# EAGLE board LIC_rack_PB-00 (EAGLE 7.2.0)
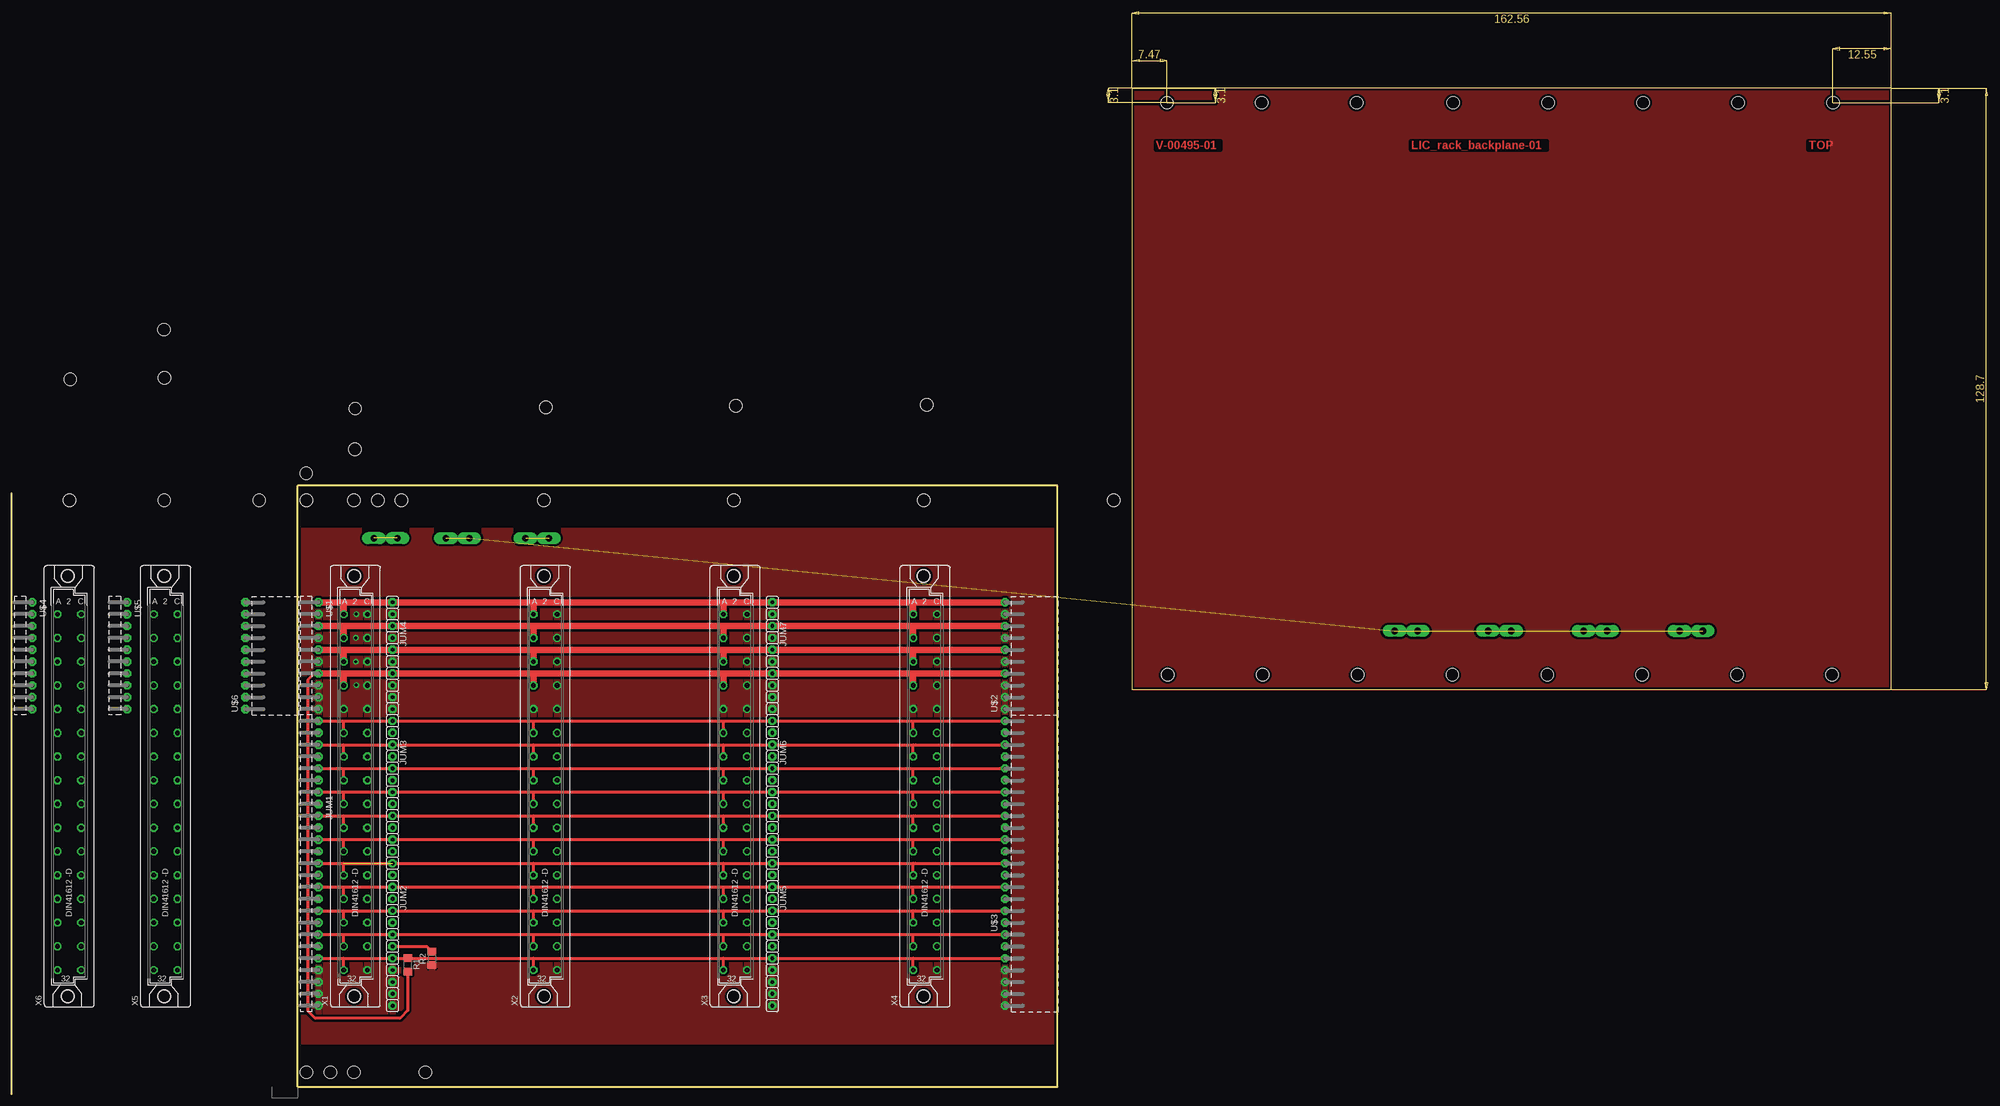
[diagram p0: board, top side]
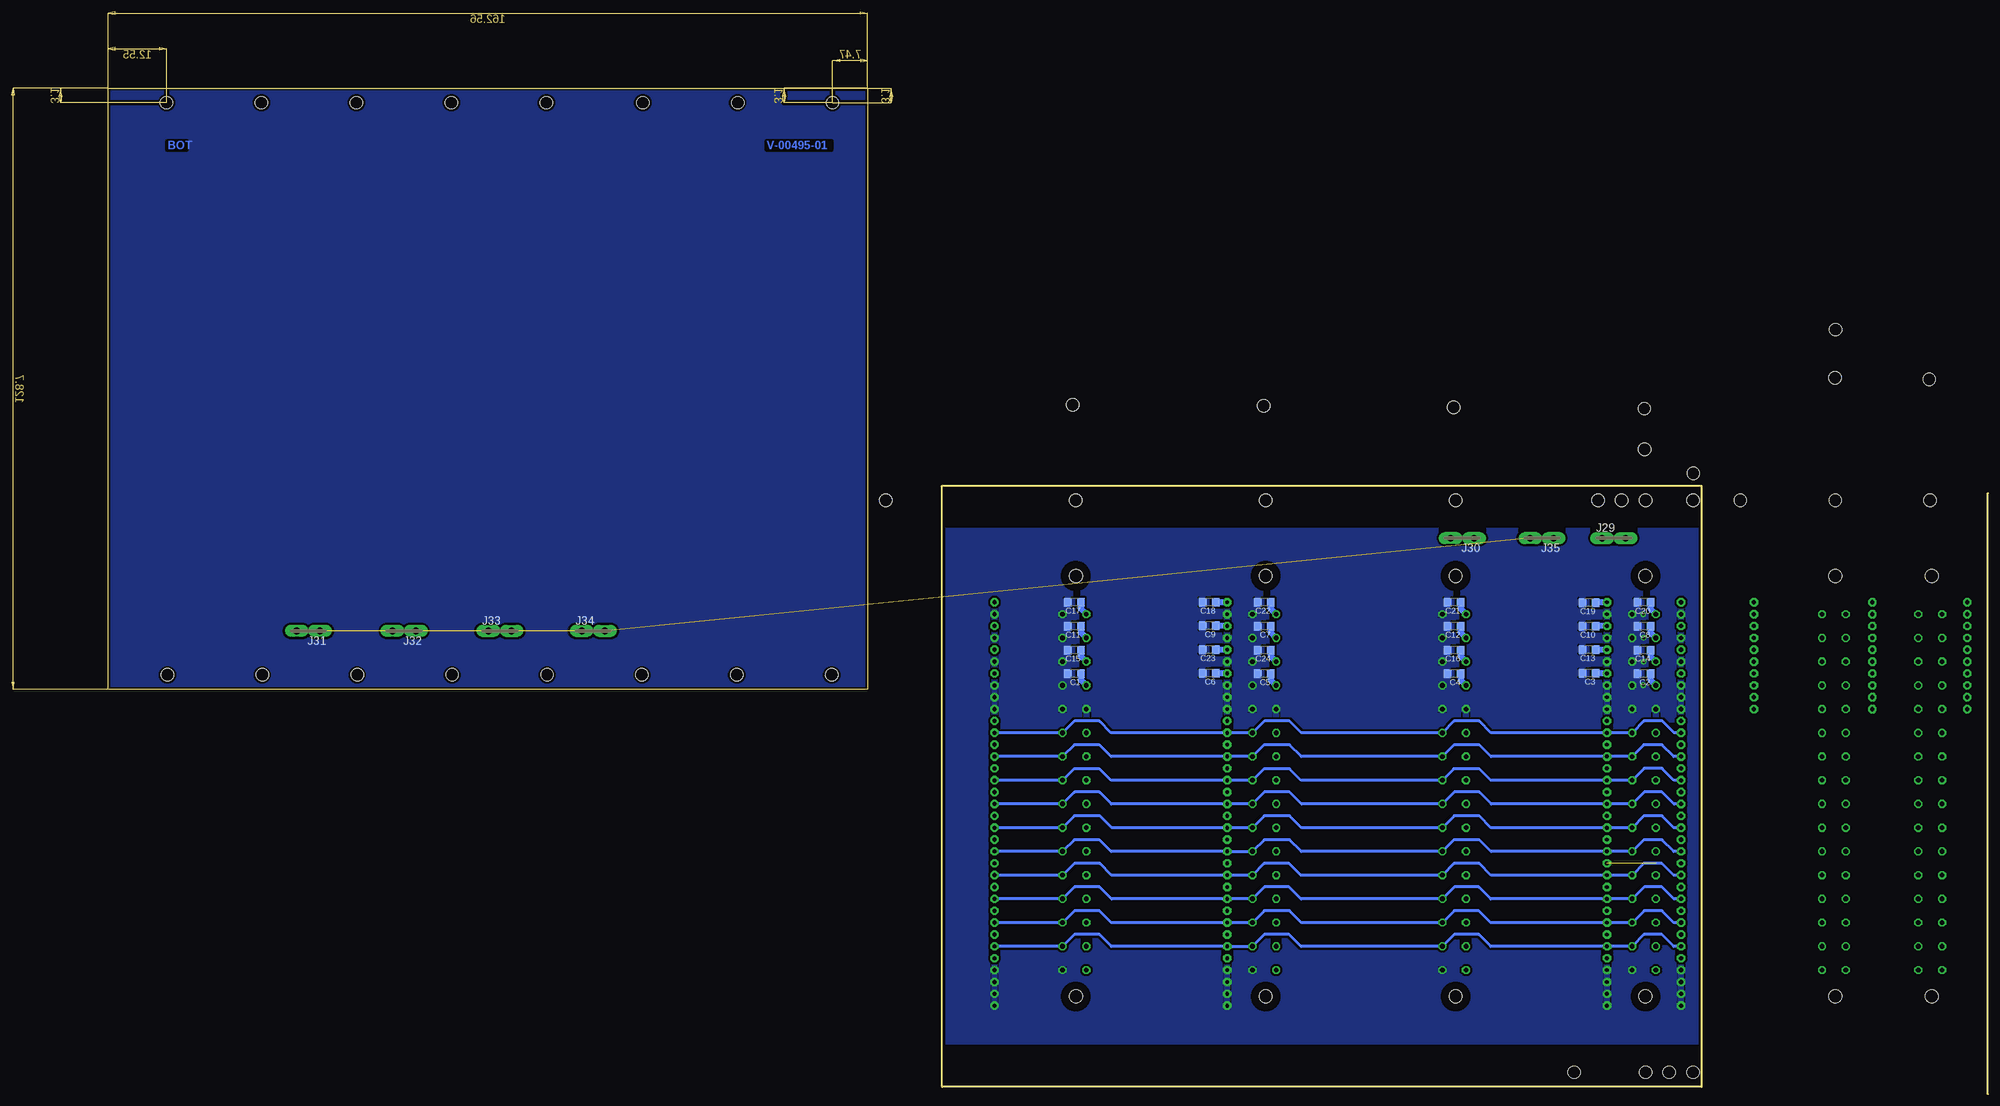
[diagram p1: board, bottom side, seen from below]

Size 402.37 x 215.39 mm. Coordinates in mm from the lower left corner, seen from the top.
Outline: 0,0 0,128.7
Outline: 239.81,86.69 402.37,86.69 402.37,215.39 239.81,215.39 239.81,86.69
Outline: 61.26,1.6 223.82,1.6 223.82,130.3 61.26,130.3 61.26,1.6
Copper layers (1*16): Top 0.04mm / dielectric 1.5mm / Bottom 0.04mm
Design rules "mucha_navrh *": minimum track width 0.2mm, minimum drill 0.6mm, track to track 0.5mm, track to pad 0.5mm, pad to pad 0.3mm, via to via 0.3mm, smd to smd 0mil, copper to edge 0.5mm, drill to drill 0.5mm, minimum pad ring 0.3mm, minimum via ring 0.3mm, stop-mask expansion 0.1mm, vias tented up to drill 0.8mm, thermal gap 0.3mm
Net classes: 0 default: clearance 0.2 mm; 1 LNPE: clearance 2.5 mm to class 0, clearance 1 mm
Holes 2.7 mm at 247.28,212.29 267.6,212.29 287.92,212.29 308.54,212.29 247.43,89.79 328.86,212.29 349.18,212.29 369.5,212.29 389.82,212.29 267.75,89.79 288.07,89.79 308.39,89.79 328.71,89.79 349.03,89.79 369.35,89.79 389.67,89.79 63.13,127.2 83.45,127.2 32.65,127.2 63.13,4.7 68.21,4.7 73.29,4.7 113.93,127.2 88.53,4.7 154.57,127.2 195.21,127.2 52.97,127.2 235.85,127.2 78.37,127.2 63.03,132.9 73.43,138.1 73.53,146.8 114.33,147.1 155.03,147.4 195.83,147.6 32.73,153.4 73.29,127.2 12.33,127.2 12.53,153.1 32.63,163.7
tRestrict: area 55.7,121.3 to 238.5,130.3; area 55.7,1.6 to 238.5,10.6
bRestrict: area 55.7,121.3 to 238.5,130.3; area 55.7,1.6 to 238.5,10.6
vRestrict: area 55.7,121.3 to 238.5,130.3; area 55.7,1.6 to 238.5,10.6

## Footprints (pad centres in the part's own frame; a part is rotated, then mirrored left to right if it is on the bottom)
C1206 = smd 1.6 x 1.8: 1 -1.4,0; 2 1.4,0
F061.100 = drill 1.4 pad 2.54 long: A1 -2.5,0; A2 2.5,0
S1G26_JU = drill 0.9 pad 1.778 octagon: 1 -60.96,0; 2 -58.42,0; 3 -55.88,0; 4 -53.34,0; 5 -50.8,0; 6 -48.26,0; 7 -45.72,0; 8 -43.18,0; 9 -40.64,0; 10 -38.1,0; 11 -35.56,0; 12 -33.02,0; 13 -30.48,0; 14 -27.94,0; 15 -25.4,0; 16 -22.86,0; 17 -20.32,0; 18 -17.78,0; 19 -15.24,0; 20 -12.7,0; 21 -10.16,0; 22 -7.62,0; 23 -5.08,0; 24 -2.54,0; 25 0,0
S1G15_JU = drill 0.813 pad 1.778 octagon: 1 -17.78,0; 2 -15.24,0; 3 -12.7,0; 4 -10.16,0; 5 -7.62,0; 6 -5.08,0; 7 -2.54,0; 8 0,0; 9 2.54,0; 10 5.08,0; 11 7.62,0; 12 10.16,0; 13 12.7,0; 14 15.24,0; 15 17.78,0
S1G10_JU = drill 0.813 pad 1.778 octagon: 1 -11.43,0; 2 -8.89,0; 3 -6.35,0; 4 -3.81,0; 5 -1.27,0; 6 1.27,0; 7 3.81,0; 8 6.35,0; 9 8.89,0; 10 11.43,0
R1206 = smd 1.6 x 1.803: 1 -1.422,0; 2 1.422,0
S1G6_JU = drill 0.9 pad 1.778 octagon: 1 -22.86,0; 2 -20.32,0; 3 -17.78,0; 4 -15.24,0; 5 -12.7,0; 6 -10.16,0; 7 -7.62,0; 8 -5.08,0; 9 -2.54,0; 10 0,0
S1B10_JU = drill 0.9 pad 1.778 octagon: 1 0,0; 2 2.54,0; 3 5.08,0; 4 7.62,0; 5 10.16,0; 6 12.7,0; 7 15.24,0; 8 17.78,0; 9 20.32,0; 10 22.86,0
S1B26_JU = drill 0.9 pad 1.778 octagon: 1 0,0; 2 2.54,0; 3 5.08,0; 4 7.62,0; 5 10.16,0; 6 12.7,0; 7 15.24,0; 8 17.78,0; 9 20.32,0; 10 22.86,0; 11 25.4,0; 12 27.94,0; 13 30.48,0; 14 33.02,0; 15 35.56,0; 16 38.1,0; 17 40.64,0; 18 43.18,0; 19 45.72,0; 20 48.26,0; 21 50.8,0; 22 53.34,0; 23 55.88,0; 24 58.42,0; 25 60.96,0
FAC32S = drill 1.016 octagon: A2 -2.54,36.83; A4 -2.54,31.75; A6 -2.54,26.67; A8 -2.54,21.59; A10 -2.54,16.51; A12 -2.54,11.43; A14 -2.54,6.35; A16 -2.54,1.27; A18 -2.54,-3.81; A20 -2.54,-8.89; A22 -2.54,-13.97; A24 -2.54,-19.05; A26 -2.54,-24.13; A28 -2.54,-29.21; A30 -2.54,-34.29; A32 -2.54,-39.37; C2 2.54,36.83; C4 2.54,31.75; C6 2.54,26.67; C8 2.54,21.59; C10 2.54,16.51; C12 2.54,11.43; C14 2.54,6.35; C16 2.54,1.27; C18 2.54,-3.81; C20 2.54,-8.89; C22 2.54,-13.97; C24 2.54,-19.05; C26 2.54,-24.13; C28 2.54,-29.21; C30 2.54,-34.29; C32 2.54,-39.37 | hole 2.794: -0.305,45.009; -0.305,-45.009

## Placement (x,y rotation side)
C1  100n  [C1206]  195.51,90.05 180 bottom
C2  100n  [C1206]  73.59,90.05 180 bottom
C3  100n  [C1206]  85.35,90.15 180 bottom
C4  100n  [C1206]  114.23,90.05 180 bottom
C5  100n  [C1206]  154.87,90.05 180 bottom
C6  100n  [C1206]  166.66,90.15 180 bottom
C7  100n  [C1206]  154.87,100.2 180 bottom
C8  100n  [C1206]  73.59,100.2 180 bottom
C9  100n  [C1206]  166.66,100.3 180 bottom
C10  100n  [C1206]  85.35,100.2 180 bottom
C11  100n  [C1206]  195.51,100.2 180 bottom
C12  100n  [C1206]  114.23,100.2 180 bottom
C13  100n  [C1206]  85.35,95.2 180 bottom
C14  100n  [C1206]  73.59,95.1 180 bottom
C15  100n  [C1206]  195.51,95.1 180 bottom
C16  100n  [C1206]  114.23,95.1 180 bottom
C17  100n  [C1206]  195.51,105.35 180 bottom
C18  100n  [C1206]  166.66,105.35 180 bottom
C19  100n  [C1206]  85.35,105.25 180 bottom
C20  100n  [C1206]  73.59,105.3 180 bottom
C21  100n  [C1206]  114.23,105.35 180 bottom
C22  100n  [C1206]  154.87,105.35 180 bottom
C23  100n  [C1206]  166.66,95.2 180 bottom
C24  100n  [C1206]  154.87,95.1 180 bottom
J29  PIN2F061.100  [F061.100]  80.03,119.07 0 bottom
J30  PIN2F061.100  [F061.100]  112.49,119.07 180 bottom
J31  PIN2F061.100  [F061.100]  359.49,99.19 180 bottom
J32  PIN2F061.100  [F061.100]  338.99,99.19 180 bottom
J33  PIN2F061.100  [F061.100]  318.49,99.19 0 bottom
J34  PIN2F061.100  [F061.100]  298.49,99.19 0 bottom
J35  PIN2F061.100  [F061.100]  95.43,119.07 180 bottom
JUM1  S1G26_JUMP  [S1G26_JU]  65.66,18.96 270 top
JUM2  S1G15_JUMP  [S1G15_JU]  81.52,36.74 270 top
JUM3  S1G10_JUMP  [S1G10_JU]  81.52,68.49 270 top
JUM4  S1G10_JUMP  [S1G10_JU]  81.52,93.89 270 top
JUM5  S1G15_JUMP  [S1G15_JU]  162.83,36.74 270 top
JUM6  S1G10_JUMP  [S1G10_JU]  162.83,68.49 270 top
JUM7  S1G10_JUMP  [S1G10_JU]  162.83,93.89 270 top
R1  100k  [R1206]  84.79,27.69 270 top
R2  100k  [R1206]  89.97,29.13 90 top
U$1  S1G10_JUMP  [S1G6_JU]  65.66,82.46 270 top
U$2  S1B10_JUMP  [S1B10_JU]  212.62,82.46 90 top
U$3  S1B25_JUMP  [S1B26_JU]  212.62,18.96 90 top
U$4  S1G10_JUMP  [S1G6_JU]  4.4,82.46 270 top
U$5  S1G10_JUMP  [S1G6_JU]  24.72,82.46 270 top
U$6  S1B10_JUMP  [S1B10_JU]  50.06,82.46 90 top
X1  FAC32SE  [FAC32S]  73.59,65.95 0 top
X2  FAC32SE  [FAC32S]  114.23,65.95 0 top
X3  FAC32SE  [FAC32S]  154.87,65.95 0 top
X4  FAC32SE  [FAC32S]  195.51,65.95 0 top
X5  FAC32SE  [FAC32S]  32.95,65.95 0 top
X6  FAC32SE  [FAC32S]  12.33,65.95 0 top

## Library data of the parts
C1-C24 R1 R2 = rcl
J29-J35 = con-faston
JUM1 U$1-U$6 = LIC_ALL-00
JUM2-JUM7 = #PaJa_konektory
X1-X6 = con-vg

## Nets
+5V: C1.1 C2.1 C3.1 C4.1 C5.1 C6.1 JUM4.7 JUM7.7 R1.2 U$1.7 U$2.4 X1.A8 X2.A8 X3.A8 X4.A8
+12V: C7.1 C8.1 C9.1 C10.1 C11.1 C12.1 JUM4.3 JUM7.3 U$1.3 U$2.8 X1.A4 X2.A4 X3.A4 X4.A4
+24V: C17.1 C18.1 C19.1 C20.1 C21.1 C22.1 JUM4.1 JUM7.1 U$1.1 U$2.10 X1.A2 X2.A2 X3.A2 X4.A2
-12V: C13.1 C14.1 C15.1 C16.1 C23.1 C24.1 JUM4.5 JUM7.5 U$1.5 U$2.6 X1.A6 X2.A6 X3.A6 X4.A6
EXT_RS485+: JUM1.19 JUM2.9 JUM5.9 U$3.7 X1.A30 X2.A30 X3.A30 X4.A30
EXT_RS485-: JUM1.18 JUM2.8 JUM5.8 U$3.8 X1.C28 X2.C28 X3.C28 X4.C28
GND: C1.2 C2.2 C3.2 C4.2 C5.2 C6.2 C7.2 C8.2 C9.2 C10.2 C11.2 C12.2 C13.2 C14.2 C15.2 C16.2 C17.2 C18.2 C19.2 C20.2 C21.2 C22.2 C23.2 C24.2 JUM1.22 JUM1.23 JUM1.24 JUM1.25 JUM2.12 JUM2.13 JUM2.14 JUM2.15 JUM4.2 JUM4.4 JUM4.6 JUM4.8 JUM4.9 JUM4.10 JUM5.12 JUM5.13 JUM5.14 JUM5.15 JUM7.2 JUM7.4 JUM7.6 JUM7.8 JUM7.9 JUM7.10 R2.1 U$1.2 U$1.4 U$1.6 U$1.8 U$1.9 U$1.10 U$2.1 U$2.2 U$2.3 U$2.5 U$2.7 U$2.9 U$3.1 U$3.2 U$3.3 U$3.4 X1.A10 X1.C2 X1.C4 X1.C6 X1.C8 X1.C10 X1.C32 X2.A10 X2.C2 X2.C4 X2.C6 X2.C8 X2.C10 X2.C32 X3.A10 X3.C2 X3.C4 X3.C6 X3.C8 X3.C10 X3.C32 X4.A10 X4.C2 X4.C4 X4.C6 X4.C8 X4.C10 X4.C32
L [LNPE]: J29.A1 J29.A2
MODUL_RST: JUM1.17 JUM2.7 JUM5.7 U$3.9 X1.A28 X2.A28 X3.A28 X4.A28
N [LNPE]: J30.A1 J30.A2
PE [LNPE]: J31.A1 J31.A2 J32.A1 J32.A2 J33.A1 J33.A2 J34.A1 J34.A2 J35.A1 J35.A2
RS485+: JUM1.21 JUM2.11 JUM5.11 R1.1 U$3.5 X1.A32 X2.A32 X3.A32 X4.A32
RS485-: JUM1.20 JUM2.10 JUM5.10 R2.2 U$3.6 X1.C30 X2.C30 X3.C30 X4.C30
SYNC01: JUM1.1 JUM3.1 JUM6.1 U$3.25 X1.A12 X2.A12 X3.A12 X4.A12
SYNC02: JUM1.2 JUM3.2 JUM6.2 U$3.24 X1.C12 X2.C12 X3.C12 X4.C12
SYNC03: JUM1.3 JUM3.3 JUM6.3 U$3.23 X1.A14 X2.A14 X3.A14 X4.A14
SYNC04: JUM1.4 JUM3.4 JUM6.4 U$3.22 X1.C14 X2.C14 X3.C14 X4.C14
SYNC05: JUM1.5 JUM3.5 JUM6.5 U$3.21 X1.A16 X2.A16 X3.A16 X4.A16
SYNC06: JUM1.6 JUM3.6 JUM6.6 U$3.20 X1.C16 X2.C16 X3.C16 X4.C16
SYNC07: JUM1.7 JUM3.7 JUM6.7 U$3.19 X1.A18 X2.A18 X3.A18 X4.A18
SYNC08: JUM1.8 JUM3.8 JUM6.8 U$3.18 X1.C18 X2.C18 X3.C18 X4.C18
SYNC09: JUM1.9 JUM3.9 JUM6.9 U$3.17 X1.A20 X2.A20 X3.A20 X4.A20
SYNC10: JUM1.10 JUM3.10 JUM6.10 U$3.16 X1.C20 X2.C20 X3.C20 X4.C20
SYNC11: JUM1.11 JUM2.1 JUM5.1 U$3.15 X1.A22 X2.A22 X3.A22 X4.A22
SYNC12: JUM1.12 JUM2.2 JUM5.2 U$3.14 X1.C22 X2.C22 X3.C22 X4.C22
SYNC13: JUM1.13 JUM2.3 JUM5.3 U$3.13 X1.A24 X2.A24 X3.A24 X4.A24
SYNC14: JUM1.14 JUM2.4 JUM5.4 U$3.12 X1.C24 X2.C24 X3.C24 X4.C24
SYNC15: JUM1.15 JUM2.5 JUM5.5 U$3.11 X1.A26 X2.A26 X3.A26 X4.A26
SYNC16: JUM1.16 JUM2.6 JUM5.6 U$3.10 X1.C26 X2.C26 X3.C26 X4.C26

## Tracks (layer width: path | path; a pad name or v marks a point on that pad's centre or on a via)
+5V
  Top 0.61: R1.2 84.79,17.93 83.16,16.3 64.96,16.3 63.46,17.8 63.46,88.8 64.74,90.08 U$1.7
  Top 1.422: 111.69,90.08 152.33,90.08 | 152.33,90.08 JUM7.7 192.97,90.08 | 192.97,90.08 U$2.4 | X2.A8 111.69,90.08 | X3.A8 152.33,90.08 | X4.A8 192.97,90.08 | 111.69,90.08 JUM4.7 71.05,90.08 | 71.05,90.08 X1.A8 | U$1.7 71.05,90.08
  Bottom 1.27: C1.1 194.11,88.68 X4.A8 | C5.1 153.47,88.68 X3.A8 | JUM7.7 165.19,90.08 C6.1 | C4.1 112.83,88.68 X2.A8 | C2.1 72.19,88.68 X1.A8 | JUM4.7 83.88,90.08 C3.1
+12V
  Top 1.422: 71.05,100.24 JUM4.3 111.69,100.24 | 111.69,100.24 152.33,100.24 | 152.33,100.24 JUM7.3 192.97,100.24 | 192.97,100.24 U$2.8 | X1.A4 71.05,100.24 | X2.A4 111.69,100.24 | X3.A4 152.33,100.24 | X4.A4 192.97,100.24 | U$1.3 71.05,100.24
  Bottom 1.27: C11.1 194.11,98.84 X4.A4 | C7.1 153.47,98.84 X3.A4 | JUM7.3 165.2,100.24 C9.1 | C12.1 112.83,98.84 X2.A4 | C8.1 72.19,98.84 X1.A4 | JUM4.3 83.91,100.24 C10.1
+24V
  Top 1.422: 84.76,105.32 JUM4.1 71.05,105.32 71.05,105 | 84.76,105.32 111.69,105.32 | 111.69,105.32 152.33,105.32 | 152.33,105.32 JUM7.1 192.97,105.32 | 192.97,105.32 U$2.10 | X1.A2 71.05,105 | X2.A2 111.69,105.32 | X3.A2 152.33,105.32 | X4.A2 192.97,105.32 | 84.76,105.31 84.76,105.32 | U$1.1 70.73,105.32 71.05,105
  Bottom 1.27: C17.1 194.11,103.92 X4.A2 | C22.1 153.47,103.92 X3.A2 | JUM7.1 165.23,105.32 C18.1 | C21.1 112.83,103.92 X2.A2 | C20.1 72.19,103.92 X1.A2 | JUM4.1 83.88,105.32 C19.1
-12V
  Top 1.422: 111.69,95.16 152.33,95.16 | 152.33,95.16 JUM7.5 192.97,95.16 | 192.97,95.16 U$2.6 | X1.A6 71.05,94.8 | 71.05,94.8 71.05,95.16 JUM4.5 111.69,95.16 | X2.A6 111.69,95.16 | X3.A6 152.33,95.16 | X4.A6 192.97,95.16 | U$1.5 70.69,95.16 71.05,94.8
  Bottom 1.27: C15.1 194.11,93.76 X4.A6 | C24.1 153.47,93.76 X3.A6 | JUM7.5 165.22,95.16 C23.1 | C16.1 112.83,93.76 X2.A6 | C14.1 72.19,93.76 X1.A6 | JUM4.5 83.91,95.16 C13.1
EXT_RS485+
  Top 0.61: JUM1.19 70.96,34.2 | 70.96,34.2 JUM2.9 111.66,34.2 | 111.66,34.2 152.33,34.2 | 152.33,34.2 JUM5.9 192.97,34.2 | U$3.7 193.06,34.2 192.97,34.2 | X1.A30 71.05,34.11 70.96,34.2 | X2.A30 111.69,34.17 111.66,34.2 | X3.A30 152.33,34.2 | X4.A30 192.97,34.2
EXT_RS485-
  Bottom 0.61: JUM1.18 67.2,36.74 69.76,39.3 73.57,39.3 X1.C28 JUM2.8 106.4,36.74 108.96,39.3 114.21,39.3 X2.C28 146.9,36.74 149.46,39.3 154.85,39.3 X3.C28 JUM5.8 187.6,36.74 190.16,39.3 195.49,39.3 X4.C28 U$3.8
GND  (via drill 0.6)
  other vias: 73.66,92.6 73.76,87.6 73.66,97.7 73.76,102.8
  pour Bottom (rank 2): 239.81,86.69 402.37,86.69 402.37,215.39 239.81,215.39
  pour Top (rank 2): 239.81,86.69 402.37,86.69 402.37,215.39 239.81,215.39
  pour Top: 61.26,130.3 61.26,1.6 223.82,1.6 223.82,130.3
  pour Bottom: 61.26,1.6 223.82,1.6 223.82,130.4 61.26,130.4
L  (1 unrouted)
MODUL_RST
  Top 0.61: JUM1.17 71.06,39.28 | 71.06,39.28 JUM2.7 111.66,39.28 | 111.66,39.28 152.33,39.28 | 152.33,39.28 JUM5.7 192.97,39.28 | U$3.9 193.36,39.28 192.97,39.28 | X1.A28 71.05,39.27 71.06,39.28 | X2.A28 111.69,39.25 111.66,39.28 | X3.A28 152.33,39.28 | X4.A28 192.97,39.28
N  (1 unrouted)
PE  (9 unrouted)
RS485+
  Top 0.61: JUM1.21 71.06,29.12 | 71.06,29.12 JUM2.11 84.66,29.12 | 84.66,29.12 111.66,29.12 | 111.66,29.12 152.33,29.12 | 152.33,29.12 JUM5.11 192.97,29.12 | 192.97,29.12 U$3.5 | X1.A32 71.05,29.11 71.06,29.12 | X2.A32 111.69,29.09 111.66,29.12 | X3.A32 152.33,29.12 | X4.A32 192.97,29.12 | R1.1 84.67,29.11 84.66,29.12
RS485-
  Top 0.61: JUM2.10 88.86,31.66 R2.2
  Bottom 0.61: JUM1.20 67.22,31.66 69.76,34.2 73.59,34.2 X1.C30 JUM2.10 106.42,31.66 108.96,34.2 114.23,34.2 X2.C30 147.02,31.66 149.56,34.2 154.87,34.2 X3.C30 JUM5.10 187.62,31.66 190.16,34.2 195.51,34.2 X4.C30 U$3.6
SYNC01
  Top 0.61: JUM1.1 71.06,79.92 | 71.06,79.92 JUM3.1 111.69,79.92 | 111.69,79.92 152.33,79.92 | 152.33,79.92 JUM6.1 192.97,79.92 | U$3.25 193.46,79.92 192.97,79.92 | X1.A12 71.05,79.91 71.06,79.92 | X2.A12 111.69,79.92 | X3.A12 152.33,79.92 | X4.A12 192.97,79.92
SYNC02
  Bottom 0.61: 67.04,77.38 JUM1.2 67.14,77.38 69.66,79.9 73.61,79.9 X1.C12 JUM3.2 106.34,77.38 108.86,79.9 114.25,79.9 X2.C12 146.94,77.38 149.46,79.9 154.89,79.9 X3.C12 JUM6.2 187.64,77.38 190.16,79.9 195.53,79.9 X4.C12 U$3.24
SYNC03
  Top 0.61: JUM1.3 71.06,74.84 | 71.06,74.84 JUM3.3 111.69,74.84 | 111.69,74.84 152.33,74.84 | 152.33,74.84 JUM6.3 192.97,74.84 | U$3.23 193.56,74.84 192.97,74.84 | X1.A14 71.05,74.83 71.06,74.84 | X2.A14 111.69,74.84 | X3.A14 152.33,74.84 | X4.A14 192.97,74.84
SYNC04
  Bottom 0.61: JUM1.4 67.26,72.3 69.76,74.8 73.63,74.8 X1.C14 JUM3.4 106.36,72.3 108.86,74.8 114.27,74.8 X2.C14 146.96,72.3 149.46,74.8 154.91,74.8 X3.C14 JUM6.4 187.66,72.3 190.16,74.8 195.55,74.8 X4.C14 U$3.22
SYNC05
  Top 0.61: JUM1.5 70.96,69.76 | 70.96,69.76 JUM3.5 111.69,69.76 | 111.69,69.76 152.33,69.76 | 152.33,69.76 JUM6.5 192.97,69.76 | U$3.21 193.36,69.76 192.97,69.76 | X1.A16 71.05,69.67 70.96,69.76 | X2.A16 111.69,69.76 | X3.A16 152.33,69.76 | X4.A16 192.97,69.76
SYNC06
  Bottom 0.61: JUM1.6 67.18,67.22 69.76,69.8 73.55,69.8 X1.C16 JUM3.6 106.38,67.22 108.86,69.7 114.29,69.7 X2.C16 146.98,67.22 149.46,69.7 154.93,69.7 X3.C16 JUM6.6 187.68,67.22 190.16,69.7 195.57,69.7 X4.C16 U$3.20
SYNC07
  Top 0.61: JUM1.7 71.06,64.68 | 71.06,64.68 JUM3.7 111.69,64.68 | 111.69,64.68 152.33,64.68 | 152.33,64.68 JUM6.7 192.97,64.68 | U$3.19 193.46,64.68 192.97,64.68 | X1.A18 71.05,64.67 71.06,64.68 | X2.A18 111.69,64.68 | X3.A18 152.33,64.68 | X4.A18 192.97,64.68
SYNC08
  Bottom 0.61: JUM1.8 67.2,62.14 69.76,64.7 73.57,64.7 X1.C18 JUM3.8 106.3,62.14 108.86,64.7 114.21,64.7 X2.C18 146.9,62.14 149.46,64.7 154.85,64.7 X3.C18 JUM6.8 187.6,62.14 190.16,64.7 195.49,64.7 X4.C18 U$3.18
SYNC09
  Top 0.61: JUM1.9 71.06,59.6 | 71.06,59.6 JUM3.9 111.69,59.6 | 111.69,59.6 152.33,59.6 | 152.33,59.6 JUM6.9 192.97,59.6 | U$3.17 193.36,59.6 192.97,59.6 | X1.A20 71.05,59.59 71.06,59.6 | X2.A20 111.69,59.6 | X3.A20 152.33,59.6 | X4.A20 192.97,59.6
SYNC10
  Bottom 0.61: JUM1.10 67.22,57.06 69.76,59.6 73.59,59.6 X1.C20 JUM3.10 106.32,57.06 108.86,59.6 114.23,59.6 X2.C20 146.92,57.06 149.46,59.6 154.87,59.6 X3.C20 JUM6.10 187.52,57.06 190.06,59.6 195.51,59.6 X4.C20 U$3.16
SYNC11
  Top 0.61: JUM1.11 71.06,54.52 | 71.06,54.52 JUM2.1 111.66,54.52 | 111.66,54.52 152.33,54.52 | 152.33,54.52 JUM5.1 192.97,54.52 | U$3.15 193.46,54.52 192.97,54.52 | X1.A22 71.05,54.51 71.06,54.52 | X2.A22 111.69,54.49 111.66,54.52 | X3.A22 152.33,54.52 | X4.A22 192.97,54.52
SYNC12
  Bottom 0.61: JUM1.12 67.24,51.98 69.76,54.5 73.61,54.5 X1.C22 JUM2.2 106.34,51.98 108.86,54.5 114.25,54.5 X2.C22 146.94,51.98 149.46,54.5 154.89,54.5 X3.C22 JUM5.2 187.64,51.98 190.16,54.5 195.53,54.5 X4.C22 U$3.14
SYNC13  (1 unrouted)
  Top 0.61: JUM1.13 71.06,49.44 | 71.06,49.44 111.66,49.44 | 111.66,49.44 152.33,49.44 | 152.33,49.44 JUM5.3 192.97,49.44 | U$3.13 193.36,49.44 192.97,49.44 | X1.A24 71.05,49.43 71.06,49.44 | X2.A24 111.69,49.41 111.66,49.44 | X3.A24 152.33,49.44 | X4.A24 192.97,49.44
SYNC14
  Bottom 0.61: JUM1.14 67.26,46.9 69.76,49.4 73.63,49.4 X1.C24 JUM2.4 106.36,46.9 108.86,49.4 114.27,49.4 X2.C24 147.06,46.9 149.56,49.4 154.91,49.4 X3.C24 JUM5.4 187.56,46.9 190.06,49.4 195.55,49.4 X4.C24 U$3.12
SYNC15
  Top 0.61: JUM1.15 71.06,44.36 | 71.06,44.36 JUM2.5 111.66,44.36 | 111.66,44.36 152.33,44.36 | 152.33,44.36 JUM5.5 192.97,44.36 | U$3.11 193.16,44.36 192.97,44.36 | X1.A26 71.05,44.35 71.06,44.36 | X2.A26 111.69,44.33 111.66,44.36 | X3.A26 152.33,44.36 | X4.A26 192.97,44.36
SYNC16
  Bottom 0.61: JUM1.16 67.18,41.82 69.76,44.4 73.55,44.4 X1.C26 JUM2.6 106.38,41.82 108.96,44.4 114.19,44.4 X2.C26 146.98,41.82 149.56,44.4 154.83,44.4 X3.C26 JUM5.6 187.58,41.82 190.16,44.4 195.47,44.4 X4.C26 U$3.10

## Text on the board
Top: V-00495-01 | LIC_rack_backplane-01 | TOP
Bottom: V-00495-01 | BOT
tTest: 8HU | 2HU | 4HU | 8HU | 2HU | 8HU | 8HU | 8HU | 8HU | 2HU | 4HU | 4HU